# Altium PCB PCB2.PcbDoc
Units mm, origin at the board's own origin, x right, y up, seen from the top; angles counter-clockwise.
Board outline 132.72 x 101.98 mm, 2 copper layers (Top Layer, Bottom Layer); 36 components, 32 nets, 157 pads, 11 vias.
Unrouted connection lines stored in the file: 5.
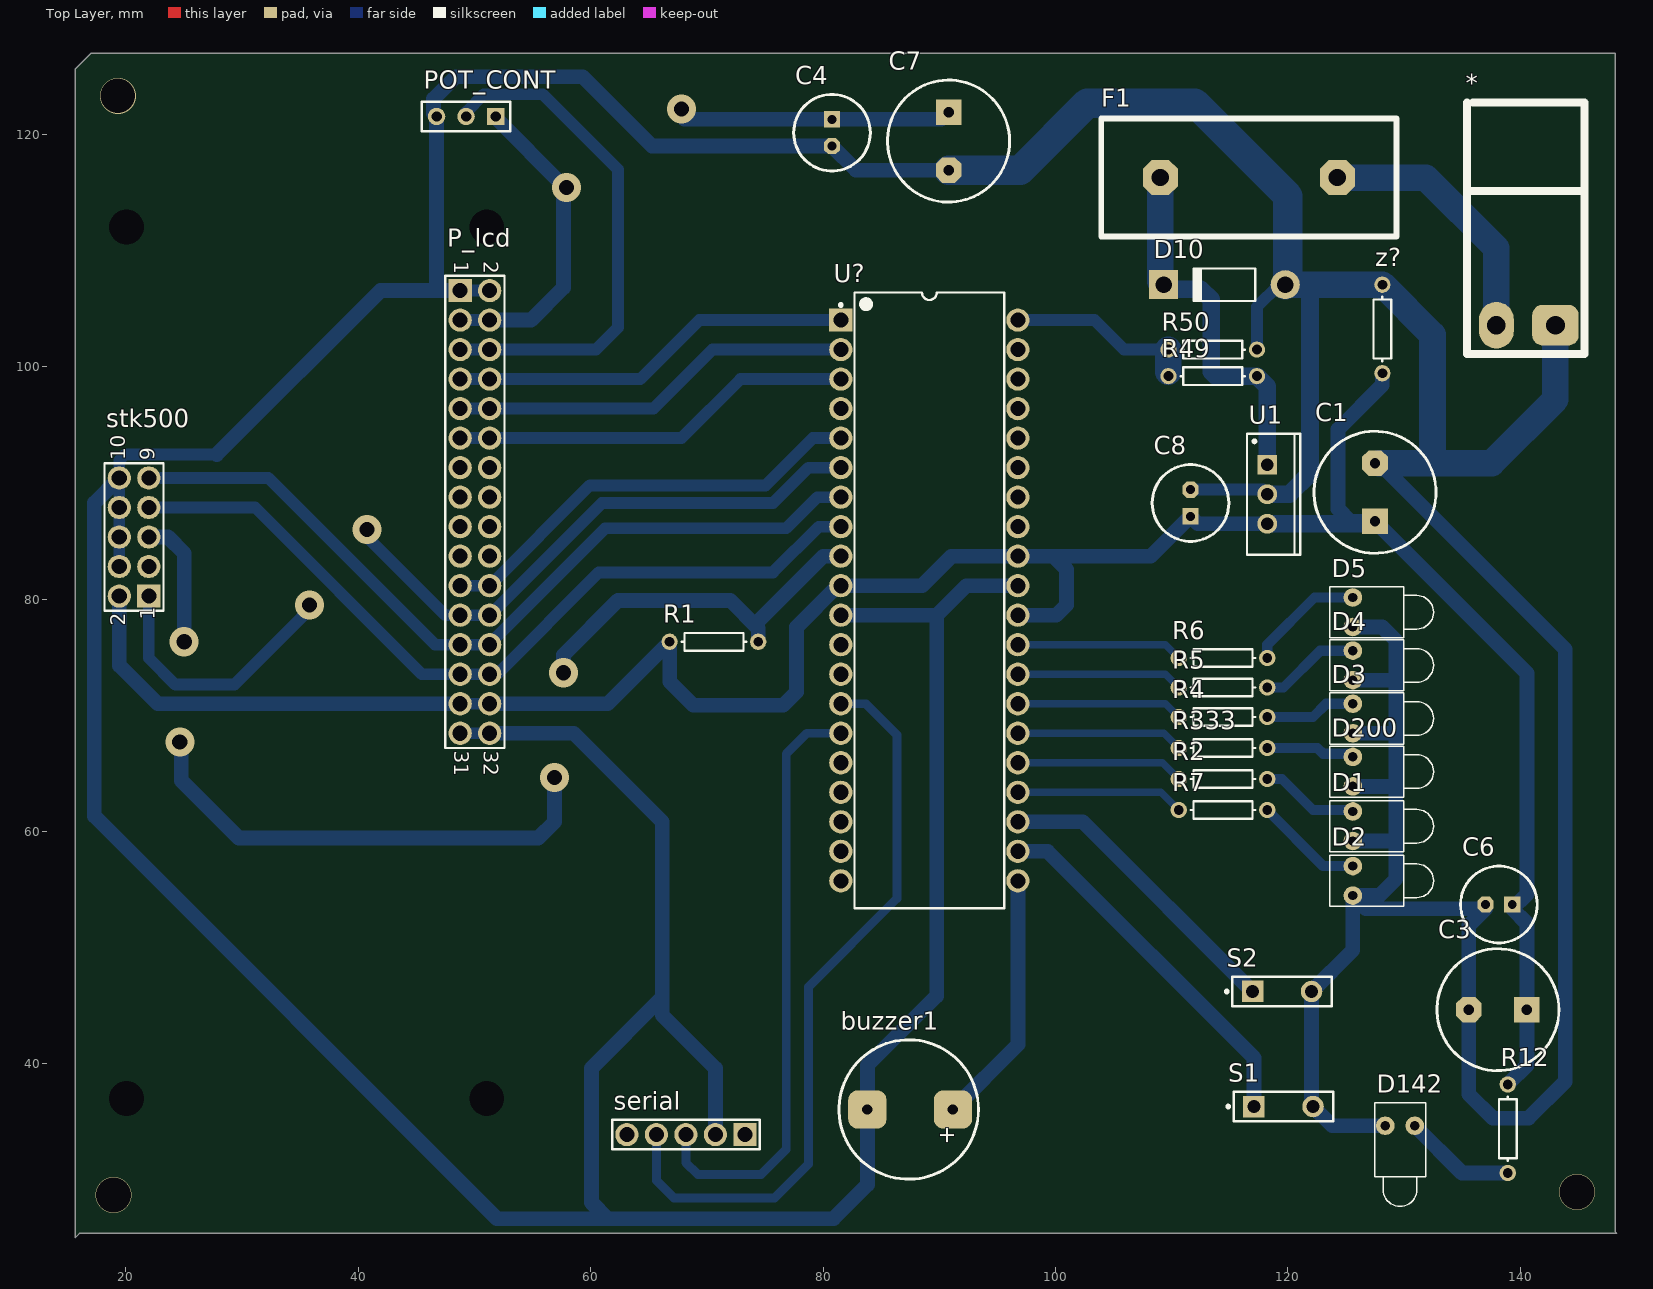
[diagram p0: Top Layer view]
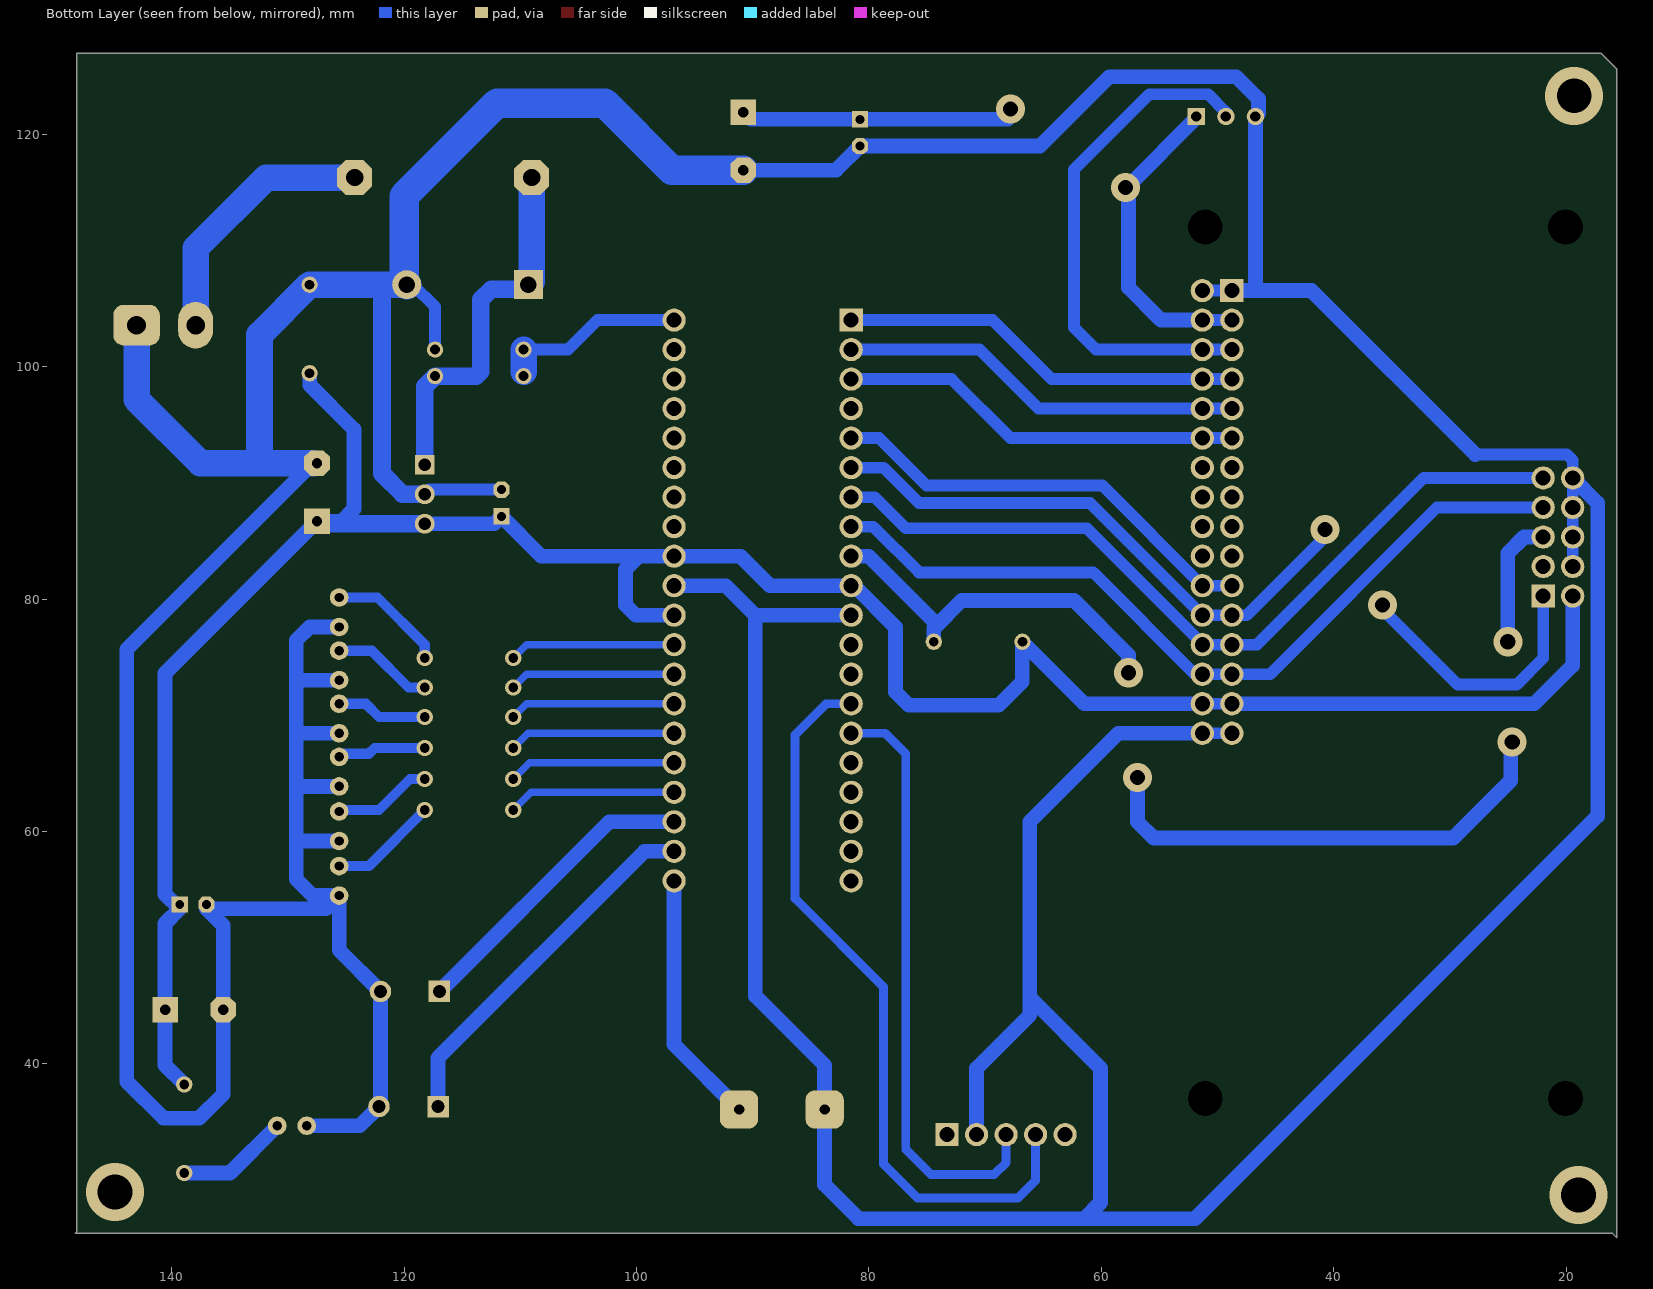
[diagram p1: Bottom Layer view, seen from below]

## Layer stack, top to bottom
Top Solder: solder mask 0.0102, Solder Resist, Dk 3.5
Top Layer: signal copper 0.0356
Dielectric 1: dielectric 0.32, FR-4, Dk 4.8
Bottom Layer: signal copper 0.0356
Bottom Solder: solder mask 0.0102, Solder Resist, Dk 3.5

## Board outline
15.621,25.019 16.002,25.4 148.336,25.4 148.209,25.527 148.209,127 17.018,127 15.621,125.603

## Design rules (kind name [scope] priority, off if disabled: settings)
Clearance [All] p1: gap=0.254 ignorepadtopadclearanceinfootprint=FALSE except(0: Arc-Hole Track-Hole SMDPad-Hole THPad-Hole Via-Hole Fill-Hole Poly-Hole Region-Hole Text-Hole)
PolygonConnect [All] p1: connectstyle=Relief reliefconductorwidth=0.254 reliefentries=4 polygonreliefangle="90 Angle" airgapwidth=0.254
RoutingLayers [All] p1: top layer_v5=FALSE bottom layer_v5=TRUE
RoutingVias [All] p1: holewidth=0.711 width=1.27 viastyle="Through Hole" minholewidth=0.711 minwidth=1.27 maxholewidth=0.711 maxwidth=1.27
SolderMaskExpansion [All] p1: expansion=0.102
Width [All] p1: maxlimit=2.54 minlimit=0.254 preferedwidth=1.016 minimp=50.000000 maximp=50.000000 favimp=50.000000
29 further rules are at their usual default settings.

## Components (designator, comment, footprint, x,y, rotation, side; value= is the part's Value field where it differs from the comment)
* "PHOENIX_2_PIN_FEMALE" PHOENIX_2_PIN_FEMALE 141.986,111.76 r180 top
buzzer1 "buzzer" buzzer 87.249,36.068 r90 top
C1 "Cap" cap1 127.381,92.369 r270 top value=100pF
C3 "Cap" cap1 134.914,44.531 r0 top value=100pF
C4 "Cap" cap2 80.899,118.618 r90 top value=100pF
C6 "Cap" cap2 136.652,53.587 r0 top value=100pF
C7 "Cap" cap1 90.932,116.245 r90 top value=100pF
C8 "Cap" cap2 111.506,89.796 r270 top value=100pF
D1 "LED1" LED-1 125.603,60.452 r0 top
D2 "LED1" LED-1 125.603,55.753 r0 top
D3 "LED1" LED-1 125.603,69.723 r0 top
D4 "LED1" LED-1 125.603,74.295 r0 top
D5 "LED1" LED-1 125.603,78.867 r0 top
D10 "Diode 1N4001" DO-41 114.554,107.061 r180 top
D142 "LED1" LED-1 129.667,34.671 r270 top
D200 "LED2" LED-1 125.603,65.151 r0 top
F1 "Fuse 2" fuse 124.079,116.332 r180 top
P_lcd "Header 16X2" HDR2X16 48.768,106.553 r270 top
POT_CONT "Header 3" HDR1X3 51.816,121.539 r180 top
R1 "Res1" AXIAL-0.3 70.612,76.327 r180 top value=4.7kilo
R2 "Res1" AXIAL-0.3 114.427,64.516 r0 top value=330
R4 "Res1" AXIAL-0.3 114.427,69.85 r0 top value=330
R5 "Res1" AXIAL-0.3 114.427,72.39 r0 top value=330
R6 "Res1" AXIAL-0.3 114.427,74.93 r0 top value=330
R7 "Res1" AXIAL-0.3 114.427,61.849 r0 top value=330
R12 "Res1" AXIAL-0.3 138.938,34.417 r270 top value=330
R49 "Res1" AXIAL-0.3 113.538,99.187 r0 top value=1k
R50 "Res1" AXIAL-0.3 113.538,101.473 r180 top value=3k
R333 "Res1" AXIAL-0.3 114.427,67.183 r0 top value=330
S1 "SW-PB" SPST-2 119.634,36.322 r0 top
S2 "SW-PB" SPST-2 119.507,46.228 r0 top
serial "Header 5" HDR1X5 73.279,33.909 r180 top
stk500 "Header 5X2" HDR2X5 21.971,80.264 r90 top
U1 "L7805CV" TO220 118.237,89.027 r270 top
U? "ATmega16A-PU" 40P6 89.154,79.883 r0 top
z? "zener diod sod-80" AXIAL-0.3 128.143,103.251 r270 top

## Footprints (in the part's own frame and the unit in brackets; to place one, negate y for a bottom-side part, rotate by r counter-clockwise, add the part's x,y. Pads: shape width x height; smd on the part's side, far side on the other; paste and mask are expansions set on the pad)
40P6 [mm] "40-Pin Ceramic Dual In-Line Package (CerDIP)"
  rect 2x2 hole 1.3: 1(-7.62,24.13)
  round 2 hole 1.3: 2(-7.62,21.59) 3(-7.62,19.05) 4(-7.62,16.51) 5(-7.62,13.97) 6(-7.62,11.43) 7(-7.62,8.89) 8(-7.62,6.35) 9(-7.62,3.81) 10(-7.62,1.27) 11(-7.62,-1.27) 12(-7.62,-3.81) 13(-7.62,-6.35) 14(-7.62,-8.89) 15(-7.62,-11.43) 16(-7.62,-13.97) 17(-7.62,-16.51) 18(-7.62,-19.05) 19(-7.62,-21.59) 20(-7.62,-24.13) 21(7.62,-24.13) 22(7.62,-21.59) 23(7.62,-19.05) 24(7.62,-16.51) 25(7.62,-13.97) 26(7.62,-11.43) 27(7.62,-8.89) 28(7.62,-6.35) 29(7.62,-3.81) 30(7.62,-1.27) 31(7.62,1.27) 32(7.62,3.81) 33(7.62,6.35) 34(7.62,8.89) 35(7.62,11.43) 36(7.62,13.97) 37(7.62,16.51) 38(7.62,19.05) 39(7.62,21.59) 40(7.62,24.13)
  silkscreen extent -7.74,-26.5 6.45,26.5, body extent -7.05,-26.47 7.05,26.47, height 4.83
AXIAL-0.3 [mm] "Axial Device, Thru-Hole; 2 Leads; 0.3 in Pin Spacing"
  round 1.4 hole 0.85: 1(-3.81,0) 2(3.81,0)
  silkscreen extent -2.77,-0.76 2.77,0.76
buzzer [mm]
  rrect50% 3.3x3.3 hole 0.9: 1(0,-3.937) 2(0,3.429)
  silkscreen extent -6,-6.13 6,5.87, body extent -6,-9.83 6,5.63, height 9.65
cap1 [mm]
  oct 2.2x2.2 hole 0.9: 1(0.675,0.127)
  rect 2.2x2.2 hole 0.9: 2(5.675,0.127)
  silkscreen extent -2.07,-5.12 8.42,5.38, body extent -2.07,-5.12 8.42,5.38, height 17
cap2 [mm]
  oct 1.4x1.4 hole 0.762: 1(0.374,0.127)
  rect 1.4x1.4 hole 0.762: 2(2.674,0.127)
  silkscreen extent -1.77,-3.17 4.82,3.43, body extent -1.78,-3.17 4.82,3.43, height 12
DO-41 [mm] "Diode, Axial; Body 5.2 x 2.7 mm (LxDia. max), Lead Dia. 0.86 mm (max)"
  round 2.5 hole 1.4: 1(-5.23,0)
  rect 2.5x2.5 hole 1.4: 2(5.23,0)
  silkscreen extent -2.65,-1.4 2.75,1.4
fuse [mm]
  oct 3x3 hole 1.5: 1(-0.197,0.048) 2(15.043,0.048)
  silkscreen extent -5.28,-5.03 20.12,5.13, body extent -5.53,-5.28 20.37,5.38, height 10
HDR1X3 [mm] "Connector; Header; 3 Position"
  rect 1.5x1.5 hole 0.9: 1(0,0)
  round 1.5 hole 0.9: 2(2.54,0) 3(5.08,0)
  silkscreen extent -1.27,-1.27 6.35,1.27
HDR1X5 [mm] "Connector; Header; 5 Position"
  rect 2x2 hole 1.3: 1(0,0)
  round 2 hole 1.3: 2(2.54,0) 3(5.08,0) 4(7.62,0) 5(10.16,0)
  silkscreen extent -1.27,-1.27 11.43,1.27
HDR2X5 [mm] "Connector; Header; 5x2 Position"
  rect 2x2 hole 1.3: 1(0,0)
  round 2 hole 1.3: 2(0,2.54) 3(2.54,0) 4(2.54,2.54) 5(5.08,0) 6(5.08,2.54) 7(7.62,0) 8(7.62,2.54) 9(10.16,0) 10(10.16,2.54)
  silkscreen extent -1.27,-1.27 11.43,3.81
HDR2X16 [mm] "Connector; Header; 16x2 Position"
  rect 2x2 hole 1.3: 1(0,0)
  round 2 hole 1.3: 2(0,2.54) 3(2.54,0) 4(2.54,2.54) 5(5.08,0) 6(5.08,2.54) 7(7.62,0) 8(7.62,2.54) 9(10.16,0) 10(10.16,2.54) 11(12.7,0) 12(12.7,2.54) 13(15.24,0) 14(15.24,2.54) 15(17.78,0) 16(17.78,2.54) 17(20.32,0) 18(20.32,2.54) 19(22.86,0) 20(22.86,2.54) 21(25.4,0) 22(25.4,2.54) 23(27.94,0) 24(27.94,2.54) 25(30.48,0) 26(30.48,2.54) 27(33.02,0) 28(33.02,2.54) 29(35.56,0) 30(35.56,2.54) 31(38.1,0) 32(38.1,2.54)
  silkscreen extent -1.27,-1.27 39.37,3.81
LED-1 [mm] "LED; 2 Leads"
  round 1.6 hole 0.8: 1(0,1.27) 2(0,-1.27)
  silkscreen extent -2,-2.2 6.95,2.2
PHOENIX_2_PIN_FEMALE [mm]
  rrect50% 4x3.5 hole 1.6: 1(-1.056,8.184)
  oval 3x4 hole 1.6: 2(4.024,8.184)
  silkscreen extent -3.56,-10.99 6.56,10.67, body extent -3.69,-1.94 6.31,10.06, height 8.6
SPST-2 [mm] "Switch; 2 Leads"
  rect 1.85x1.85 hole 1.1: 1(-2.54,0)
  round 1.85 hole 1.1: 2(2.54,0)
  silkscreen extent -4.89,-1.27 4.28,1.27
TO220 [mm] "TO, Thru-Hole, Vertical, Heatsink Mounted; 3 In-Line Leads; Pitch 2.54 mm"
  rect 1.7x1.7 hole 1.1: 1(-2.54,0)
  round 1.7 hole 1.1: 2(0,0) 3(2.54,0)
  silkscreen extent -5.2,-1.75 5.2,2.85, body extent -5.25,-1.8 5.25,2.9, height 19.7

## Part data
C1 C3 C4 C6 C7 C8: "Capacitor", LatestRevisionDate=17-Jul-2002, LatestRevisionNote="Re-released for DXP Platform.", PackageDescription="Radial Cap, Thru-Hole; 2 Leads; 0.3 in Pin Spacing", PackageReference=RAD-0.3, Published=8-Jun-2000, Publisher="Altium Limited"
D1 D2 D3 D4 D5 D142: "Typical RED GaAs LED", LatestRevisionDate=08-Jul-2005, LatestRevisionNote="Mech Layer 1 removed.", PackageDescription="LED; 2 Leads", PackageReference=LED-1, Published=8-Jun-2000, Publisher="Altium Limited"
D10: "1 Amp General Purpose Rectifier", Code_JEDEC=DO-204-AL, ComponentLink1Description="Manufacturer Link", ComponentLink1URL=http://www.fairchildsemi.com/, ComponentLink2Description=Datasheet, ComponentLink2URL=http://www.fairchildsemi.com/ds/1N%2F1N4001.pdf, DatasheetVersion=1998, LatestRevisionDate=17-Jul-2002, LatestRevisionNote="Re-released for DXP Platform.", PackageDescription="Diode, Axial; Body 5.2 x 2.7 mm (LxDia. max), Lead Dia. 0.86 mm (max)", PackageReference=DO-41, PackageVersion=Aug-1999, Published=8-Jun-2000, Publisher="Altium Limited"
D200: library part LED1, "Typical RED GaAs LED", LatestRevisionDate=08-Jul-2005, LatestRevisionNote="Mech Layer 1 removed.", PackageDescription="LED; 2 Leads", PackageReference=LED-1, Published=8-Jun-2000, Publisher="Altium Limited"
F1: "Fuse", LatestRevisionDate=17-Jul-2002, LatestRevisionNote="Re-released for DXP Platform.", PackageDescription="Thru-Hole; 2 Leads", PackageReference=PIN-W2/E2.8, Published=8-Jun-2000, Publisher="Altium Limited"
P_lcd: "Header, 16-Pin, Dual row", LatestRevisionDate=17-Jul-2002, LatestRevisionNote="Re-released for DXP Platform.", Publisher="Altium Limited"
POT_CONT: "Header, 3-Pin", LatestRevisionDate=17-Jul-2002, LatestRevisionNote="Re-released for DXP Platform.", Publisher="Altium Limited"
R1 R2 R4 R5 R6 R7 R12 R49 R50 R333: "Resistor", LatestRevisionDate=17-Jul-2002, LatestRevisionNote="Re-released for DXP Platform.", PackageDescription="Axial Device, Thru-Hole; 2 Leads; 0.3 in Pin Spacing", PackageReference=AXIAL-0.3, Published=8-Jun-2000, Publisher="Altium Limited"
S1 S2: "Switch", LatestRevisionDate=17-Jul-2002, LatestRevisionNote="Re-released for DXP Platform.", PackageDescription="Switch; 2 Leads", PackageReference=SPST-2, Published=24-Mar-1999, Publisher="Altium Limited"
serial: "Header, 5-Pin", LatestRevisionDate=17-Jul-2002, LatestRevisionNote="Re-released for DXP Platform.", Publisher="Altium Limited"
stk500: "Header, 5-Pin, Dual row", LatestRevisionDate=17-Jul-2002, LatestRevisionNote="Re-released for DXP Platform.", Publisher="Altium Limited"
U1: "Positive Voltage Regulator, 5V, 3-Pin TO-220", ComponentLink1Description="Manufacturer URL", ComponentLink1URL=http://www.st.com, ComponentLink2Description=Datasheet, ComponentLink2URL=http://www.st.com/internet/com/TECHNICAL_RESOURCES/TECHNICAL_LITERATURE/DATASHEET/CD00000444.pdf, ComponentLink3Description="Package Specification", ComponentLink3URL=http://www.st.com/internet/com/TECHNICAL_RESOURCES/TECHNICAL_LITERATURE/PACKAGE_INFORMATION/CD00004649.pdf, DatasheetVersion=Nov-2011, PackageDescription="TO, Thru-Hole, Vertical, Heatsink Mounted; 3 In-Line Leads; Pitch 2.54 mm", PackageReference=TO220, PackageVersion=ver3.0, PartNumber=L7805CV
U?: "8-bit AVR Microcontroller, 16KB Flash, 512 Bytes EEPROM, 1KB SRAM, 40-pin PDIP, Industrial Grade (-40°C to 85°C)", Code_JEDEC=MS-011-AC, ComponentLink1Description="Manufacturer URL", ComponentLink1URL=http://www.atmel.com/, ComponentLink2Description="ATmega16A Datasheet", ComponentLink2URL=http://www.atmel.com/dyn/resources/prod_documents/doc8154.pdf, ComponentLink3Description="ATmega16A Summary", ComponentLink3URL=http://www.atmel.com/dyn/resources/prod_documents/8154S.pdf, DatasheetVersion="revB, Jul-2009", PackageDescription="40-lead (0.600\"/15.24mm Wide) Plastic Dual Inline Package (PDIP)", PackageReference=40P6, PackageVersion="revB, Sep-2001"

## Free pads (board coordinates)
  round 1.524 hole 3: 2(20.054,37.014) 2(51.054,37.014) 3(20.054,112.014) 3(51.054,112.014)

## Via types
v1: diameter 2.5, hole 1.3, Top Layer to Bottom Layer, 8 vias
v2: diameter 3.1/5 (per signal layer), hole 3, Top Layer to Bottom Layer, 3 vias

## Nets (pads, with @x,y where several pads share a name; then routed paths per layer and width w, separated by ;. In a path a pad name is that pad's centre, name@x,y a point inside that pad or via, vN(x,y) a via of type N, cw(c..) or ccw(c..) an arc to the next point about the centre after c; other vN are vias at no path point)
+12: D10.2 F1.2 R49.2 U1.1 | length 32.3
  Bottom Layer w1.524: D10.2 109.705,106.68 112.522,106.68 113.411,105.791 113.411,99.568 113.792,99.187 R49.2 118.237,98.298 U1.1
  Bottom Layer w2.286: F1.2 109.036,107.349 D10.2
buzzer: buzzer1.1 U?.21 | length 22
  Bottom Layer w1.27: buzzer1.1 96.774,41.656 U?.21
contrast: P_lcd.5 P_lcd.6 POT_CONT.2 | length 44.7
  Bottom Layer w1.016: P_lcd.5 P_lcd.6 60.452,101.473 62.357,103.378 62.357,116.967 55.88,123.444 50.8,123.444 49.276,121.92 POT_CONT.2
DB4: P_lcd.21 P_lcd.22 U?.5 | length 38
  Bottom Layer w1.016: P_lcd.21 P_lcd.22 59.944,89.789 75.057,89.789 79.121,93.853 U?.5
DB5: P_lcd.23 P_lcd.24 stk500.1 U?.6 | length 72.7
  Bottom Layer w1.016: stk500.1 21.971,74.93 24.257,72.644 29.337,72.644 v1@36.449,79.756 ; v1@40.64,85.471 47.498,78.613 P_lcd.23 P_lcd.24 60.96,88.265 75.692,88.265 78.74,91.313 U?.6
  other v1: 35.814,79.502 40.767,85.979
DB6: P_lcd.25 P_lcd.26 stk500.9 U?.7 | length 70.8
  Bottom Layer w1.016: stk500.9 32.258,90.424 46.609,76.073 P_lcd.25 P_lcd.26 51.308,76.174 61.24,86.106 76.835,86.106 79.502,88.773 U?.7
DB7: P_lcd.27 P_lcd.28 stk500.7 U?.8 | length 70.8
  Bottom Layer w1.016: stk500.7 31.115,87.884 45.466,73.533 P_lcd.27 P_lcd.28 51.943,73.533 60.706,82.296 75.692,82.296 79.629,86.233 U?.8
EN: P_lcd.11 P_lcd.12 U?.3 | length 34.9
  Bottom Layer w1.016: P_lcd.11 P_lcd.12 67.818,93.853 72.898,98.933 U?.3
GND: *.1 buzzer1.2 C1.1 C3.1 C4.1 C6.1 C7.1 C8.1 D1.2 D2.2 D3.2 D4.2 D5.2 D10.1 D142.2 D200.2 P_lcd.1 P_lcd.2 P_lcd.31 P_lcd.32 POT_CONT.3 R50.1 S1.2 S2.2 serial.2 stk500.4 stk500.6 stk500.8 stk500.10 U1.2 U?.11 U?.31 z?.1 | length 659.7
  Bottom Layer w1.016: stk500.4 stk500.6 stk500.8 stk500.10 19.431,91.948 19.939,92.456 27.813,92.456 ; P_lcd.31 P_lcd.32 ; P_lcd.1 P_lcd.2 ; C8.1 117.842,89.422 U1.2 ; R50.1 117.348,105.156 119.253,107.061 D10.1
  Bottom Layer w1.27: stk500.10 17.272,88.265 17.272,61.341 51.943,26.67 80.899,26.67 83.82,29.591 buzzer1.2 83.82,39.878 89.789,45.847 89.789,78.613 ; 27.813,92.456 41.91,106.553 46.863,106.553 ; P_lcd.1 46.863,106.553 ; P_lcd.32 58.547,68.453 66.167,60.833 66.167,45.72 ; 61.468,26.67 60.071,28.067 60.071,39.624 66.167,45.72 ; serial.2 70.739,39.624 66.167,44.196 66.167,45.72 ; U?.11 89.789,78.613 ; C7.1 82.844,116.92 C4.1 65.285,118.992 59.309,124.968 48.387,124.968 46.482,123.063 46.482,121.793 POT_CONT.3 46.736,106.68 46.863,106.553 ; U?.31 92.329,81.153 89.789,78.613 ; D1.2 129.286,59.182 ; D200.2 129.159,63.881 129.286,64.008 ; D3.2 129.159,68.453 129.286,68.58 ; D4.2 129.159,73.025 129.286,72.898 ; D5.2 128.143,77.597 129.286,76.454 129.286,72.898 ; C1.1 127.889,91.694 143.891,75.692 143.891,38.481 140.716,35.306 137.668,35.306 135.589,37.385 135.589,51.903 137.026,53.34 126.746,53.34 D2.2 ; D142.2 123.825,34.671 S1.2 122.047,36.449 S2.2 125.603,49.784 D2.2 ; D2.2 127.889,54.483 129.286,55.88 129.286,59.182 ; 129.286,59.182 129.286,64.008 ; 129.286,64.008 129.286,68.58 ; 129.286,68.58 129.286,72.898
  Bottom Layer w1.524: U1.2 120.142,89.027 121.92,90.805 121.92,106.934 121.793,107.061
  Bottom Layer w2.286: D10.1 121.793,107.061 z?.1 132.461,102.743 132.461,92.075 132.842,91.694 ; C1.1@127.889,91.694 132.842,91.694 ; *.1 143.042,97.195 137.541,91.694 132.842,91.694
  Bottom Layer w2.54: C7.1 96.981,116.92 102.743,122.682 112.014,122.682 120.015,114.681 120.015,107.292 D10.1
KEY1: S1.1 U?.22 | length 31.9
  Bottom Layer w1.27: U?.22 99.314,58.293 117.094,40.513 S1.1
KEY2: S2.1 U?.23 | length 26.2
  Bottom Layer w1.27: U?.23 102.362,60.833 S2.1
LED1: R6.1 U?.29 | length 14.3
  Bottom Layer w0.635: U?.29 109.474,76.073 R6.1
LED2: R5.1 U?.28 | length 14.3
  Bottom Layer w0.635: U?.28 109.474,73.533 R5.1
LED3: R4.1 U?.27 | length 14.3
  Bottom Layer w0.635: U?.27 109.474,70.993 R4.1
LED4: R333.1 U?.26 | length 14.4
  Bottom Layer w0.635: U?.26 109.347,68.453 R333.1
LED5: R2.1 U?.25 | length 14.4
  Bottom Layer w0.635: U?.25 109.22,65.913 R2.1
LED6: R7.1 U?.24 | length 14.5
  Bottom Layer w0.635: U?.24 109.093,63.373 R7.1
Net*_2: *.2 F1.1 | length 22.8
  Bottom Layer w2.286: F1.1 131.874,116.284 137.962,110.196 *.2
NetD1_1: D1.1 R2.2 | length 8.5
  Bottom Layer w0.889: R2.2 119.507,64.516 122.174,61.849 125.476,61.849 D1.1
NetD2_1: D2.1 R7.2 | length 9.4
  Bottom Layer w0.889: R7.2 123.063,57.023 D2.1
NetD3_1: D3.1 R4.2 | length 7.8
  Bottom Layer w0.889: R4.2 122.174,69.85 123.317,70.993 D3.1
NetD4_1: D4.1 R5.2 | length 8.7
  Bottom Layer w0.889: R5.2 119.634,72.39 122.809,75.565 D4.1
NetD5_1: D5.1 R6.2 | length 10.2
  Bottom Layer w0.889: R6.2 118.237,76.073 122.301,80.137 D5.1
NetD142_1: D142.1 R12.2 | length 9.7
  Bottom Layer w1.27: D142.1 135.001,30.607 R12.2
NetD200_1: D200.1 R333.2 | length 7.7
  Bottom Layer w0.889: R333.2 122.555,67.183 123.063,66.675 125.349,66.675 D200.1
NetR49_1: R49.1 R50.2 U?.40 | length 15.9
  Bottom Layer w1.016: U?.40 103.378,104.013 105.918,101.473 R50.2
  Bottom Layer w2.286: R49.1@109.728,99.568 R50.2
R/W: P_lcd.9 P_lcd.10 U?.2 | length 34.9
  Bottom Layer w1.016: P_lcd.9 P_lcd.10 65.405,96.393 70.485,101.473 U?.2
reset: R1.1 stk500.5 U?.9 | length 84.5
  Bottom Layer w1.27: stk500.5 23.622,85.344 25.019,83.947 v1@25.019,76.581 ; v1@24.765,68.072 24.765,64.389 29.718,59.436 55.499,59.436 56.896,60.833 v1@56.896,64.262 ; v1@57.658,73.787 57.658,75.184 62.357,79.883 72.009,79.883 74.422,77.47 R1.1 ; 74.422,78.105 80.01,83.693 U?.9
  other v1: 56.896,64.643 24.638,67.691 57.658,73.66 25.019,76.327
RS: P_lcd.7 P_lcd.8 U?.1 | length 34.9
  Bottom Layer w1.016: P_lcd.7 P_lcd.8 64.262,98.933 69.342,104.013 U?.1
RX: serial.3 U?.15 | length 51.8
  Bottom Layer w0.762: serial.3 68.199,31.496 69.215,30.48 74.676,30.48 76.835,32.639 76.835,66.675 78.613,68.453 U?.15
TX: serial.4 U?.14 | length 64.9
  Bottom Layer w0.762: serial.4 65.659,29.972 67.183,28.448 75.819,28.448 78.74,31.369 78.74,46.609 86.36,54.229 86.36,68.326 83.693,70.993 U?.14
VCC: C1.2 C3.2 C4.2 C6.2 C7.2 C8.2 P_lcd.3 P_lcd.4 P_lcd.29 P_lcd.30 POT_CONT.1 R1.2 R12.1 stk500.2 U1.3 U?.10 U?.30 U?.32 z?.2 | length 264.2
  Bottom Layer w1.016: P_lcd.29 P_lcd.30 ; P_lcd.3 P_lcd.4
  Bottom Layer w1.27: stk500.2 19.431,74.295 22.733,70.993 46.101,70.993 P_lcd.29 ; P_lcd.30 61.468,70.993 R1.2 66.802,72.898 68.834,70.866 76.581,70.866 77.724,72.009 77.724,77.597 81.28,81.153 U?.10 88.519,81.153 91.059,83.693 U?.32 99.822,83.693 ; P_lcd.4 54.864,104.013 57.658,106.807 57.658,115.57 51.816,121.412 POT_CONT.1 ; v1@68.065,121.292 C4.2 90.177,121.292 C7.2 ; U?.30 100.076,78.613 100.965,79.502 100.965,82.55 99.822,83.693 ; U1.3 112.268,86.487 C8.2 108.204,83.693 99.822,83.693 ; z?.2 128.143,98.425 124.333,94.615 124.333,87.757 125.396,86.694 C1.2 140.589,73.613 140.589,54.603 139.326,53.34 140.589,52.077 C3.2 140.589,39.878 R12.1
  Bottom Layer w1.524: U1.3 127.301,86.487 C1.2
  other v1: 57.912,115.443 67.818,122.174
pads on no net: P_lcd.13 P_lcd.14 P_lcd.15 P_lcd.16 P_lcd.17 P_lcd.18 P_lcd.19 P_lcd.20 serial.1 serial.5 stk500.3 U?.4 U?.12 U?.13 U?.16 U?.17 U?.18 U?.19 U?.20 U?.33 U?.34 U?.35 U?.36 U?.37 U?.38 U?.39
copper on no net:
  other v2: 18.923,28.702 144.907,28.956 19.304,123.317

## Silkscreen, mask and mechanical layers (free items; w line width, h text height)
Mechanical 13:
  the board outline again, w0.127

## Text inside footprints (layer, text, board x,y; h text height)
buzzer1: Top Overlay "+" at 91.313,33.02 h1.4 r90
P_lcd: Top Overlay "2" at 50.8,109.093 h1.27 r270; Top Overlay "1" at 48.26,109.093 h1.27 r270; Top Overlay "31" at 48.26,66.929 h1.27 r270; Top Overlay "32" at 50.8,66.929 h1.27 r270
stk500: Top Overlay "10" at 19.939,91.948 h1.27 r90; Top Overlay "9" at 22.479,91.948 h1.27 r90; Top Overlay "1" at 22.479,78.232 h1.27 r90; Top Overlay "2" at 19.939,77.724 h1.27 r90